# EAGLE board Remote (EAGLE 5.91)

Size 50.47 x 38.09 mm. Coordinates in mm from the lower left corner, seen from the top.
Outline: 0,0 50.47,0 50.47,38.09 0,38.09 0,0
Copper layers (1*16): Top 0.035mm / dielectric 1.5mm / Bottom 0.035mm
Design rules: minimum track width 10mil, minimum drill 24mil, track to track 8mil, track to pad 8mil, pad to pad 8mil, via to via 8mil, smd to smd 8mil, copper to edge 40mil, drill to drill 8mil, minimum pad ring 10mil, minimum via ring 8mil, stop-mask expansion 4mil, vias tented up to drill 0mil, thermal gap 10mil

## Footprints (pad centres in the part's own frame; a part is rotated, then mirrored left to right if it is on the bottom)
C025-040X050 = drill 0.813 octagon: 1 -1.27,0; 2 1.27,0
E2,5-5 = drill 0.813 pad 1.6: + -1.27,0 | drill 0.813 pad 1.6 octagon: - 1.27,0
CR2032H = drill 1.118 pad 2.54 octagon: + 5.08,10.795; +@1 -5.08,10.795; - 0,-6.985
DIL08 = drill 0.813 pad 1.27: 1 -3.81,-3.81; 2 -1.27,-3.81; 3 1.27,-3.81; 4 3.81,-3.81; 5 3.81,3.81; 6 1.27,3.81; 7 -1.27,3.81; 8 -3.81,3.81
LED5MM = drill 0.813 octagon: A -1.27,0; K 1.27,0
0204/7 = drill 0.813 octagon: 1 -3.81,0; 2 3.81,0
LPT80A = drill 0.813 octagon: C 0,-1.27; E 0,1.27

## Placement (x,y rotation side)
C1  10u  [C025-040X050]  30.48,8.89 270 top
C2  10n  [C025-040X050]  35.56,8.89 90 top
C3  47u  [E2,5-5]  40.64,7.62 270 top
G1  CR2032H  [CR2032H]  10.16,29.21 270 top
IC1  LM555N  [DIL08]  34.29,17.78 270 top
LED1  [LED5MM]  19.05,19.05 90 top
LED2  [LED5MM]  29.21,27.94 0 top
R1  1k  [0204/7]  40.64,15.24 270 top
R2  1k  [0204/7]  40.64,25.4 90 top
R3  [0204/7]  19.05,8.89 90 top
R4  [0204/7]  7.62,3.81 180 top
R5  [0204/7]  26.67,20.32 90 top
T1  LPT80A  [LPT80A]  8.89,15.24 270 top

## Library data of the parts
C1-C3 R1-R5 = rcl
G1 = battery
IC1 = linear
LED1 LED2 = led
T1 = opto-trans-siemens; OC_FARNELL: unknown; OC_NEWARK: unknown

## Nets
+3V3: C3.+ G1.+ IC1.4 IC1.8 R1.2 R3.1
GND: C1.2 C2.1 C3.- G1.- IC1.1 LED1.K LED2.K T1.E
N$1: LED1.A R3.2 R4.1
N$2: R4.2 T1.C
N$3: C1.1 IC1.2 IC1.6 R2.2
N$4: IC1.7 R1.1 R2.1
N$5: LED2.A R5.2
N$6: IC1.3 R5.1
N$9: C2.2 IC1.5

## Tracks (layer width: path | path; a pad name or v marks a point on that pad's centre or on a via)
+3V3  (5 unrouted)
GND  (7 unrouted)
N$1  (2 unrouted)
N$2  (1 unrouted)
N$3  (3 unrouted)
N$4  (2 unrouted)
N$5  (1 unrouted)
N$6  (1 unrouted)
N$9  (1 unrouted)